# Altium PCB OkosEszkozBoard.PcbDoc
Units mm, origin at the board's own origin, x right, y up, seen from the top; angles counter-clockwise.
Board outline 50 x 85 mm, 2 copper layers (Top Layer, Bottom Layer); 26 components, 20 nets, 100 pads, 6 vias.
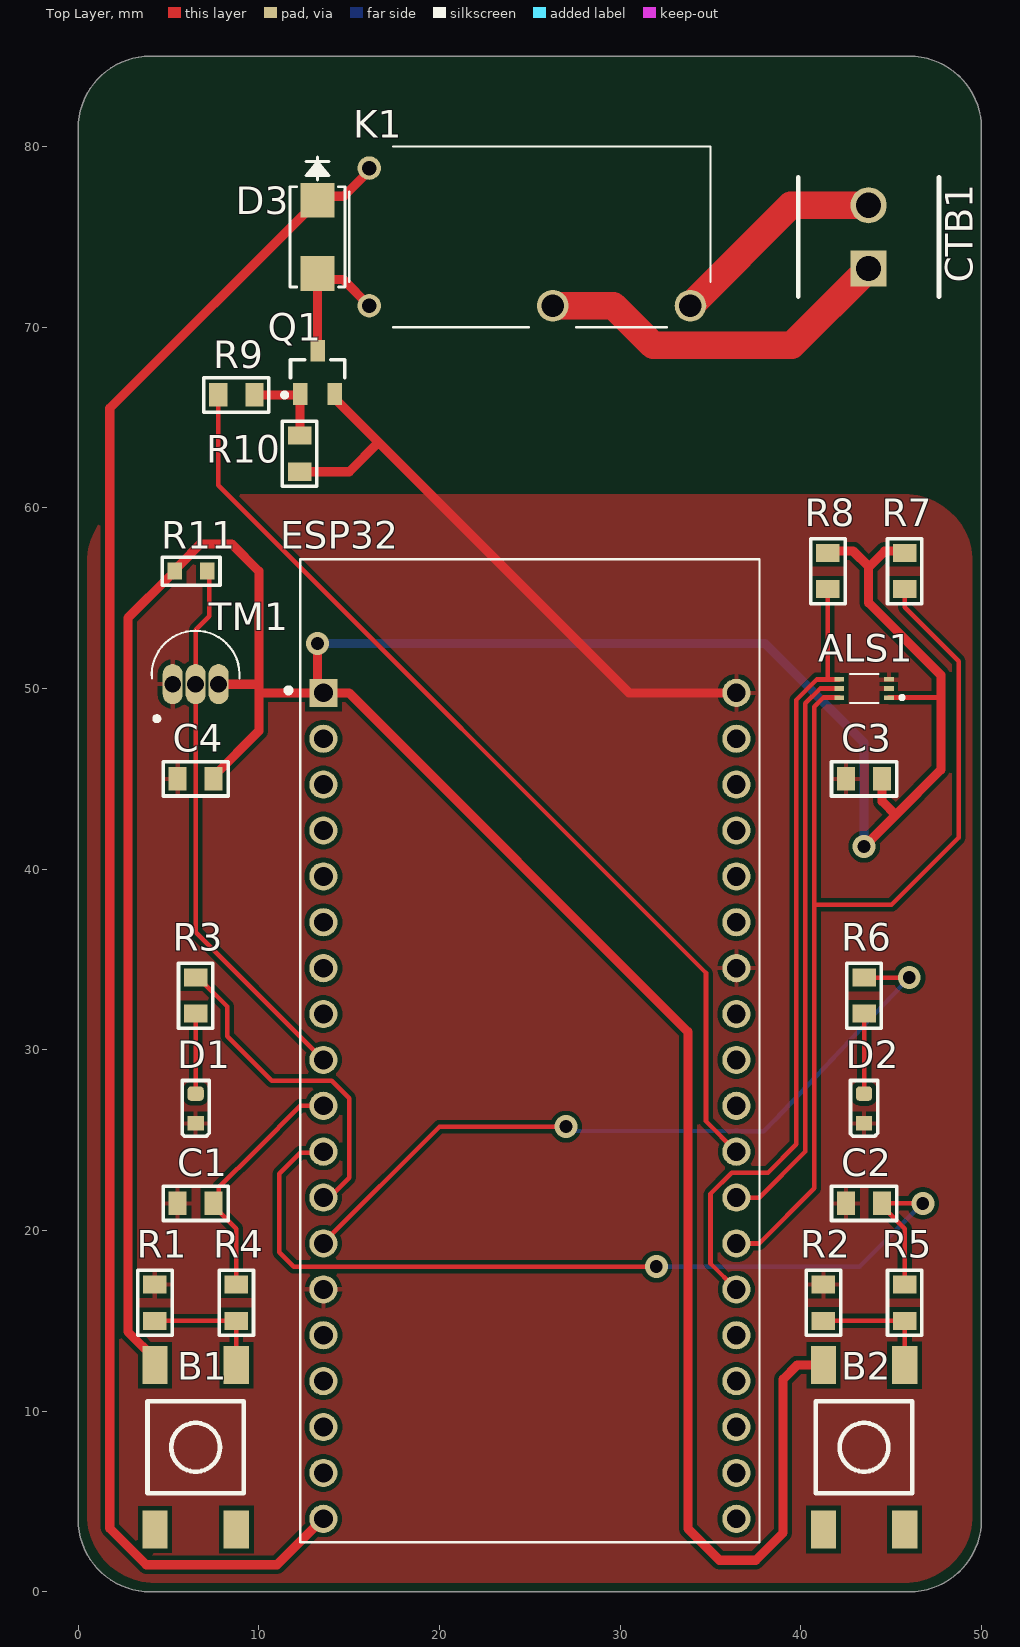
[diagram p0: Top Layer view]
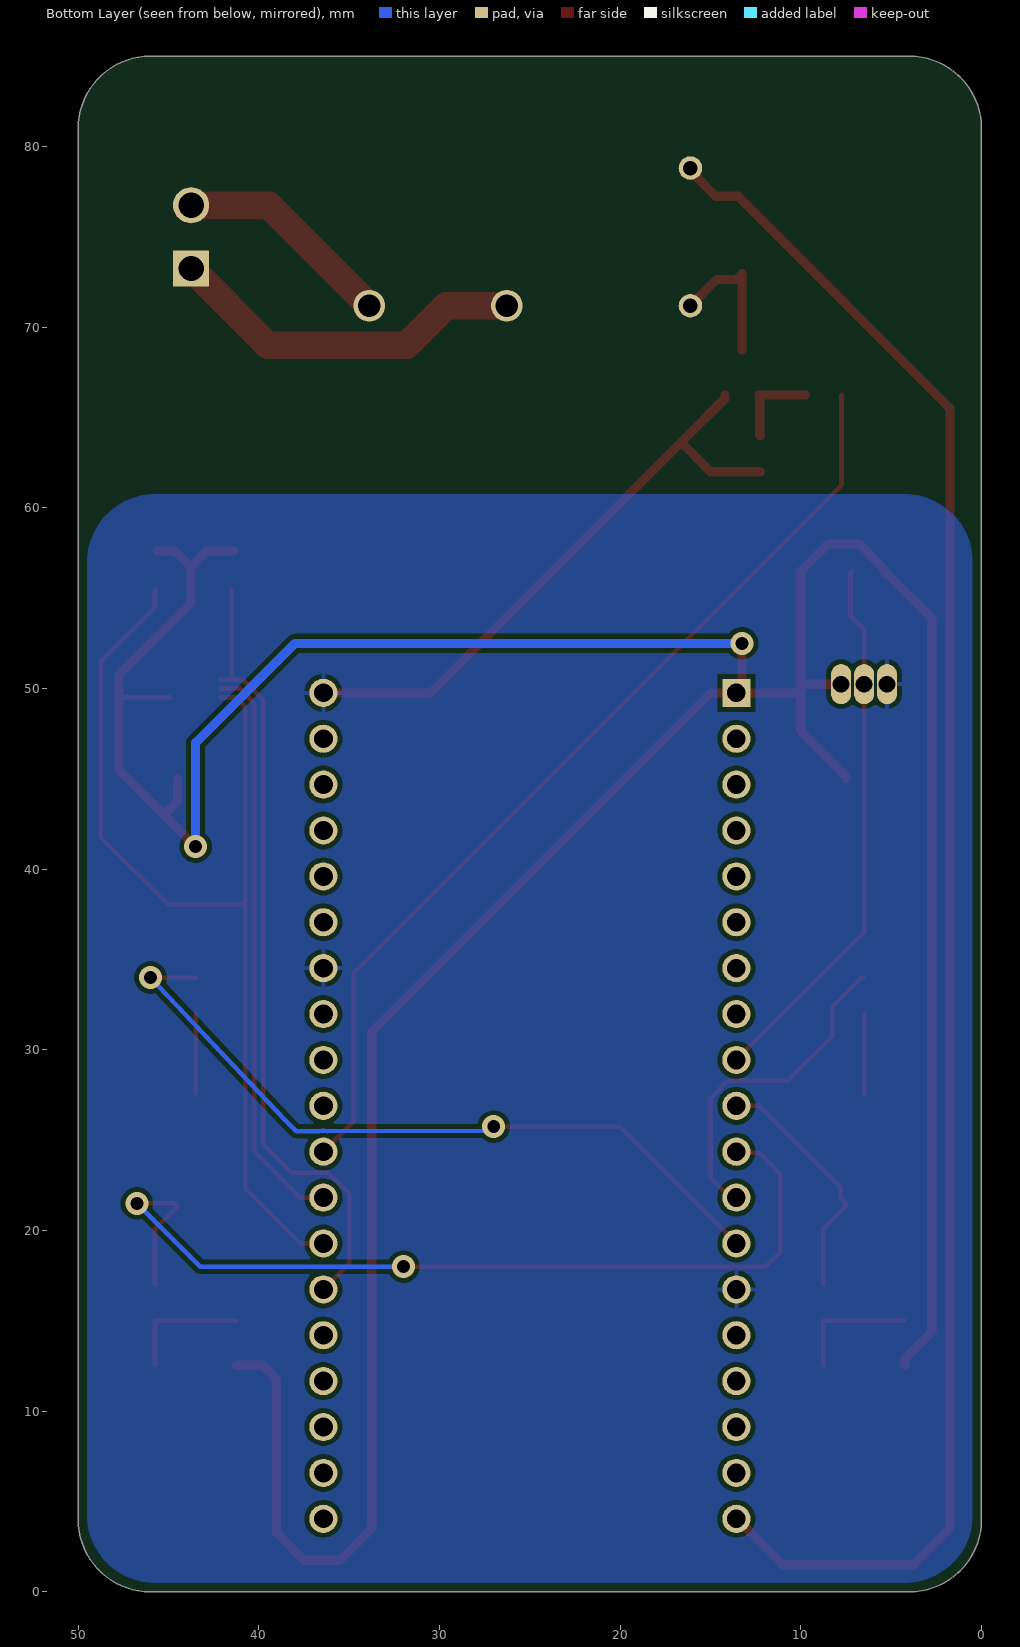
[diagram p1: Bottom Layer view, seen from below]
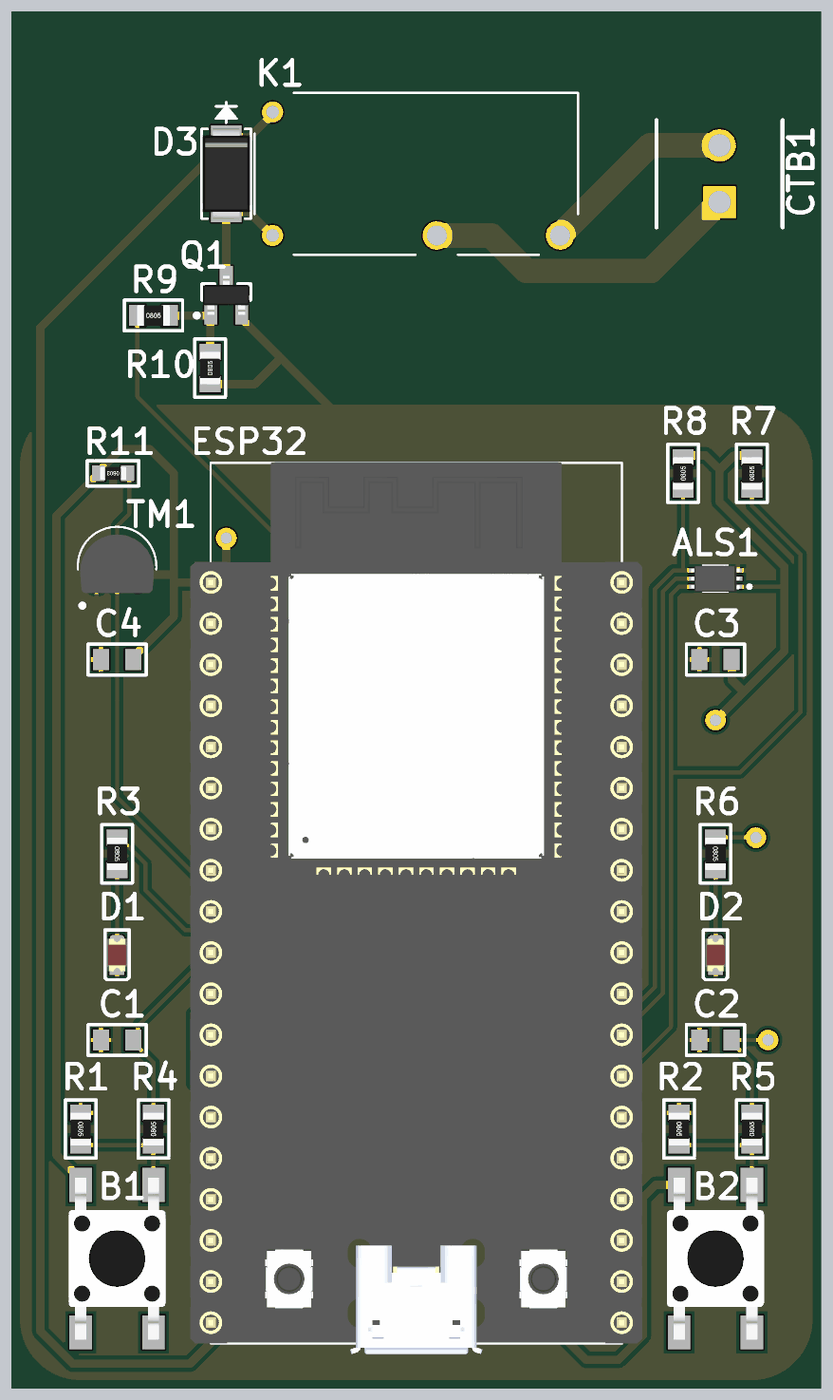
[diagram p2: 3D render of the assembled board from above, using the file's embedded part models]

## Layer stack, top to bottom
Top Solder: solder mask 0.0102, Solder Resist, Dk 3.5
Top Layer: signal copper 0.0406
Dielectric 1: dielectric 0.32, FR-4, Dk 4.8
Bottom Layer: signal copper 0.0406
Bottom Solder: solder mask 0.0102, Solder Resist, Dk 3.5

## Board outline
4,0 46,0 ccw(c46,4) 50,4 50,81 ccw(c46,81) 46,85 4,85 ccw(c4,81) 0,81 0,4 ccw(c4,4)

## Design rules (kind name [scope] priority, off if disabled: settings)
Clearance [All] p1: gap=0.254 ignorepadtopadclearanceinfootprint=TRUE except(0: Arc-Hole Track-Hole SMDPad-Hole THPad-Hole Via-Hole Fill-Hole Poly-Hole Region-Hole Text-Hole; 0.229: Arc-Arc Arc-Track Arc-SMDPad Track-Track Track-SMDPad)
PolygonConnect [All] p1: connectstyle=Relief reliefconductorwidth=0.254 reliefentries=4 polygonreliefangle="90 Angle" airgapwidth=0.254
RoutingVias [All] p1: holewidth=0.711 width=1.27 viastyle="Through Hole" minholewidth=0.711 minwidth=1.27 maxholewidth=0.711 maxwidth=1.27
SilkToSolderMaskClearance [All] p1: minsilkscreentomaskgap=0.254 clearancetoexposedcopper=TRUE
SolderMaskExpansion [All] p1: expansion=0.102 istentingtop=FALSE
Width [All] p1: maxlimit=2.032 minlimit=0.254 preferedwidth=0.254
29 further rules are at their usual default settings.

## Components (designator, comment, footprint, x,y, rotation, side; value= is the part's Value field where it differs from the comment)
ALS1 "BH1750FVI-TR" ONLAB_BH1750FVI-TR 43.5,50 r180 top
B1 "Button" FP_BTN_SMD 6.5,8 r0 top
B2 "Button" FP_BTN_SMD 43.5,8 r0 top
C1 "2.2uF" FP_0805_CAP_085 6.5,21.5 r0 top
C2 "2.2uF" FP_0805_CAP_085 43.5,21.5 r0 top
C3 "100nF" FP_0805_CAP_085 43.5,45 r0 top
C4 "100nF" FP_0805_CAP_085 6.5,45 r0 top
CTB1 "Contact Terminal Block" ONLAB_SORK_2_RN3.50 43.75,71.5 r90 top
D1 "RED LED" FP_0805_LED_RED 6.5,26.75 r270 top
D2 "RED LED" FP_0805_LED_RED 43.5,26.75 r270 top
D3 "Diode" ONLAB_SMA_DO-214AC 13.25,75 r270 top
ESP32 "NodeMCU ESP-32S" ONLAB_ESP32-DEVKITC-32D 25,30 r0 top locked (schematic designator ESP1)
K1 "Relay" ONLAB_RELAY_ALQ305 25,75 r0 top
Q1 "NMOS" ONLAB_2N7002_SOT23127P600-8N 13.25,67.5 r0 top
R1 "10K" FP_0805_RES 4.25,16 r270 top
R2 "10K" FP_0805_RES 41.25,16 r270 top
R3 "91R0" FP_0805_RES 6.5,33 r270 top
R4 "4K70" FP_0805_RES 8.75,16 r90 top
R5 "4K70" FP_0805_RES 45.75,16 r90 top
R6 "91R0" FP_0805_RES 43.5,33 r270 top
R7 "4K70" FP_0805_RES 45.75,56.5 r90 top
R8 "4K70" FP_0805_RES 41.5,56.5 r90 top
R9 "130R" FP_0805_RES 8.75,66.25 r0 top
R10 "10K" FP_0805_RES 12.25,63 r90 top
R11 "4K70" FP_0603_RES 6.25,56.5 r180 top
TM1 "DS18B20" ONLAB_DS18B20+ 6.5,51 r0 top

## Footprints (in the part's own frame and the unit in brackets; to place one, negate y for a bottom-side part, rotate by r counter-clockwise, add the part's x,y. Pads: shape width x height; smd on the part's side, far side on the other; paste and mask are expansions set on the pad)
FP_0603_RES [mm] "0603 ellenállás"
  rect 0.8x0.95 smd: 1(-0.9,0) 2(0.9,0)
  silkscreen extent -1.6,-0.77 1.6,0.77, body extent -0.8,-0.4 0.8,0.4, height 0.44
FP_0805_CAP_085 [mm] "0805 kapacitás YAGEO 0.85mm magas"
  rect 1x1.3 smd: 1(-1,0) 2(1,0)
  silkscreen extent -1.8,-0.95 1.8,0.95, body extent -1,-0.64 1.03,0.64, height 0.85
FP_0805_LED_RED [mm] "0805 méretű piros LED"
  rrect50% 0.8x0.9 smd: A(-0.825,0)
  rect 0.8x0.9 smd: K(0.825,0)
  silkscreen extent -1.55,-0.75 1.53,0.75, body extent -1.01,-0.62 1.01,0.62, height 1.1
FP_0805_RES [mm] "0805 ellenállás"
  rect 1x1.3 smd: 1(-1,0) 2(1,0)
  silkscreen extent -1.8,-0.95 1.8,0.95, body extent -1,-0.62 1,0.63, height 0.62
FP_BTN_SMD [mm] "SMD Push Button 6x6mm"
  rect 1.4x2.1 smd: 1(2.25,4.55) 2(2.25,-4.55) 3(-2.25,4.55) 4(-2.25,-4.55)
  silkscreen extent -2.67,-2.54 2.67,2.54, body extent -3,-5 3,5, height 5.1
ONLAB_2N7002_SOT23127P600-8N [mm]
  rect 0.8x1.2 smd: D(0,1.2) G(-0.95,-1.2) S(0.95,-1.2)
  silkscreen extent -1.95,-1.37 1.5,0.7, body extent -1.45,-1.2 1.45,1.2, height 0.96
ONLAB_BH1750FVI-TR [mm]
  rect 0.55x0.25 smd: 1(-1.375,0.5) 2(-1.375,0) 3(-1.375,-0.5) 4(1.375,-0.5) 5(1.375,0) 6(1.375,0.5)
  silkscreen extent -2.2,-0.8 0.78,0.8, body extent -1.5,-0.8 1.5,0.8, height 0.75
ONLAB_DS18B20+ [mm]
  oval 1.11x2.22 hole 0.93: 1(-1.27,-0.76) 2(0,-0.76) 3(1.27,-0.76)
  silkscreen extent -2.43,-2.79 2.43,2.2, body extent -2.28,-1.89 2.28,1.73, height 7.45
ONLAB_ESP32-DEVKITC-32D [mm]
  rect 1.56x1.56 hole 1.04: 1(-11.43,19.76)
  round 1.56 hole 1.04: 2(-11.43,17.22) 3(-11.43,14.68) 4(-11.43,12.14) 5(-11.43,9.6) 6(-11.43,7.06) 7(-11.43,4.52) 8(-11.43,1.98) 9(-11.43,-0.56) 10(-11.43,-3.1) 11(-11.43,-5.64) 12(-11.43,-8.18) 13(-11.43,-10.72) 14(-11.43,-13.26) 15(-11.43,-15.8) 16(-11.43,-18.34) 17(-11.43,-20.88) 18(-11.43,-23.42) 19(-11.43,-25.96) 20(11.43,19.76) 21(11.43,17.22) 22(11.43,14.68) 23(11.43,12.14) 24(11.43,9.6) 25(11.43,7.06) 26(11.43,4.52) 27(11.43,1.98) 28(11.43,-0.56) 29(11.43,-3.1) 30(11.43,-5.64) 31(11.43,-8.18) 32(11.43,-10.72) 33(11.43,-13.26) 34(11.43,-15.8) 35(11.43,-18.34) 36(11.43,-20.88) 37(11.43,-23.42) 38(11.43,-25.96)
  silkscreen extent -13.5,-27.25 12.71,27.15, body extent -13.97,-27.9 13.97,27.2, height 6.7
ONLAB_RELAY_ALQ305 [mm]
  round 1.3 hole 0.8: C1(-8.89,-3.81) C2(-8.89,3.81)
  round 1.75 hole 1.25: COM(1.27,-3.81) NO(8.89,-3.81)
  silkscreen extent -10,-5 10,5, body extent -10,-5 10,5, height 16
ONLAB_SMA_DO-214AC [mm] "Vishay Dióda"
  rect 1.92x1.88 smd: A(2.032,0) K(-2.032,0)
  silkscreen extent -4.42,-1.52 2.77,1.52, body extent -2.8,-1.47 2.8,1.48, height 2.7
ONLAB_SORK_2_RN3.50 [mm]
  rect 2x2 hole 1.4: 1(1.75,0)
  round 2 hole 1.4: 2(5.25,0)
  silkscreen extent 0.2,-3.9 6.8,3.9, body extent 0.05,-3.6 6.95,3.6, height 9.1

## Part data
ALS1: "Digital 16bit Serial Output Type Ambient Light Sensor IC"
B1 B2: library part "Button 4P", "Push button"
C1 C2 C3 C4: library part CAP, "Capacitor"
CTB1: library part CTB, "SORKAPOCS 2 P RM3.50 CPP3.5/2 (STE) LIFTES 1mmř 10A"
D1 D2: library part LED, "Typical RED GaAs LED"
D3: "Default Diode", Code_JEDEC=DO-214-AB, LatestRevisionDate=17-Jul-2002, LatestRevisionNote="Re-released for DXP Platform.", PackageDescription="DO-214-AB/SMC; 2 C-Bend Leads; Body 7.9 x 5.9 mm, inc. leads (LxW)", PackageReference=SMC, PackageVersion=Sep-1996, Published=8-Jun-2000, Publisher="Altium Limited"
ESP32: "NodeMCU ESP32 Wireless & / Bluetooth Development Board"
K1: library part Relay-SPST, "Single-Pole Single-Throw Relay", LatestRevisionDate=17-Jul-2002, LatestRevisionNote="Re-released for DXP Platform.", PackageReference=MODULE4, Published=24-Mar-1999, Publisher="Altium Limited"
Q1: "NXP - BSP030,115 - MOSFET, N CH, 30V, 10A, SOT223"
R1 R2 R3 R4 R5 R6 R7 R8 R9 R10 R11: library part RES, "Resistor"
TM1: "Programmable Resolution 1-Wire Digital Thermometer"

## Via types
v1: diameter 1.27, hole 0.711, Top Layer to Bottom Layer, 6 vias

## Nets (pads, with @x,y where several pads share a name; then routed paths per layer and width w, separated by ;. In a path a pad name is that pad's centre, name@x,y a point inside that pad or via, vN(x,y) a via of type N, cw(c..) or ccw(c..) an arc to the next point about the centre after c; other vN are vias at no path point)
3.3V: ALS1.1 B1.3 B2.3 C3.2 C4.2 ESP32.1 R7.2 R8.2 R11.2 TM1.3 | length 213.3
  Top Layer w0.254: ALS1.1 47.75,49.5
  Top Layer w0.508: B1.3 4.25,12.9 2.75,14.4 2.75,53.9 5.129,56.279 5.204,56.279 5.35,56.425 R11.2 5.496,56.646 5.496,56.721 6.25,57.475 6.25,57.5 6.75,58 8.5,58 10,56.5 10,50.25 ; C4.2 7.5,45.15 10,47.65 10,49.75 ; TM1.3 9.99,50.24 10,50.25 ; v1(13.25,52.5) 13.25,50.08 ESP32.1 ; B2.3 39.8,12.55 39.017,11.767 39.017,3.267 37.5,1.75 35.5,1.75 33.75,3.5 33.75,31 14.99,49.76 ESP32.1 ; R8.2@41.391,57.609 42.891,57.609 43.75,56.75 43.75,56.718 ; v1(43.5,41.25) 45.25,43 ; C3.2 44.5,43.75 45.25,43 ; R7.2@45.636,57.603 44.636,57.603 43.75,56.718 ; 10,49.75 10,50.25 ; 10,49.75 13.56,49.75 ESP32.1 ; 43.75,56.718 43.75,54.75 47.75,50.75 47.75,49.5 47.75,45.5 45.25,43
  Bottom Layer w0.508: v1(13.25,52.5) 38,52.5 43.5,47 v1(43.5,41.25)
5V: D3.K ESP32.19 K1.C2 | length 95.6
  Top Layer w0.508: ESP32.19@13.493,3.993 11,1.5 3.768,1.5 1.75,3.518 1.75,65.512 13.25,77.012 D3.K 13.468,77.25 14.702,77.25 16.11,78.658 K1.C2
ALS_DVI: ALS1.5 ESP32.31 | length 31.9
  Top Layer w0.254: ESP32.31 37.7,21.82 40.25,24.37 40.25,49.183 41.067,50 ALS1.5
ALS_I2C_SCL: ALS1.6 ESP32.32 R7.1 | length 58.4
  Top Layer w0.254: ESP32.32 37.7,19.28 40.75,22.33 40.75,38.021 ; ALS1.6 41.25,49.5 40.75,49 40.75,38.021 ; R7.1 45.75,54.5 48.75,51.5 48.75,41.75 45.021,38.021 40.75,38.021
ALS_I2C_SDA: ALS1.4 ESP32.33 R8.1 | length 44.2
  Top Layer w0.254: ESP32.33 35,18.17 35,22.032 36.167,23.199 38.181,23.199 39.75,24.768 39.75,49.365 40.885,50.5 41.505,50.5 ; R8.1 41.5,50.505 41.505,50.5 ; ALS1.4 41.505,50.5
BTN0: C1.2 ESP32.10 R4.2 | length 13.7
  Top Layer w0.254: R4.2 8.75,20.1 7.5,21.35 C1.2 7.782,21.782 7.782,22.382 9.873,24.473 12.3,26.9 ESP32.10
BTN1: C2.2 ESP32.11 R5.2 | length 51.8
  Top Layer w0.254: ESP32.11 13.51,24.3 12.3,24.3 11.139,23.139 11.139,18.799 11.938,18 v1(32,18) ; R5.2 45.75,20.1 44.5,21.35 44.65,21.5 v1(46.75,21.5)
  Bottom Layer w0.254: v1(32,18) 43.25,18 v1(46.75,21.5)
GND: ALS1.2 ALS1.3 C1.1 C2.1 C3.1 C4.1 D1.K D2.K ESP32.14 ESP32.20 ESP32.26 Q1.S R1.1 R2.1 R10.1 TM1.1 | length 34.2
  Top Layer w0.508: R10.1 15,62 16.625,63.625 ; Q1.S@14.2,66.25 14.2,66.05 16.625,63.625 ; ESP32.20 30.49,49.76 16.625,63.625
LED0: ESP32.13 R6.1 | length 41.4
  Top Layer w0.254: ESP32.13@13.512,19.262 20,25.75 v1(27,25.75) ; R6.1 v1(46,34)
  Bottom Layer w0.254: v1(27,25.75) 27.165,25.585 27.24,25.51 36.193,25.501 36.214,25.501 cw(c36.43,24.36) 36.648,25.5 37.144,25.5 37.941,25.5 38.544,26.103 v1(46,34)
LED1: ESP32.12 R3.1 | length 18.3
  Top Layer w0.254: R3.1 6.65,34 8.25,32.4 8.25,30.75 10.721,28.279 14.041,28.279 15,27.32 15,22.92 ESP32.12@13.839,21.759
NetB1_1: B1.1 R1.2 R4.1 | length 7
  Top Layer w0.254: R1.2 R4.1 B1.1
NetB2_1: B2.1 R2.2 R5.1 | length 6.9
  Top Layer w0.254: R2.2 R5.1 B2.1
NetCTB1_1: CTB1.1 K1.COM | length 20.1
  Top Layer w1.524: K1.COM 29.628,71.19 31.818,69 39.5,69 CTB1.1
NetCTB1_2: CTB1.2 K1.NO | length 12.2
  Top Layer w1.524: K1.NO 39.45,76.75 CTB1.2
NetD1_A: D1.A R3.2 | length 4.4
  Top Layer w0.254: D1.A R3.2
NetD2_A: D2.A R6.2 | length 4.4
  Top Layer w0.254: D2.A R6.2
NetD3_1: D3.A K1.C1 Q1.D | length 7.8
  Top Layer w0.508: Q1.D@13.25,68.75 D3.A 13.572,72.646 14.654,72.646 K1.C1
NetESP1_9: ESP32.9 R11.1 TM1.2 | length 30.3
  Top Layer w0.254: R11.1 7.25,56.4 7.25,54 6.5,53.25 TM1.2 6.5,36.51 ESP32.9
NetESP1_30: ESP32.30 R9.1 | length 53.8
  Top Layer w0.254: R9.1 7.75,61.25 34.75,34.25 34.75,26.04 ESP32.30
NetQ1_1: Q1.G R9.2 R10.2 | length 4.8
  Top Layer w0.508: R9.2 12.3,66.25 12.275,66.225 12.275,64.025 R10.2
pads on no net: B1.2 B1.4 B2.2 B2.4 ESP32.2 ESP32.3 ESP32.4 ESP32.5 ESP32.6 ESP32.7 ESP32.8 ESP32.15 ESP32.16 ESP32.17 ESP32.18 ESP32.21 ESP32.22 ESP32.23 ESP32.24 ESP32.25 ESP32.27 ESP32.28 ESP32.29 ESP32.34 ESP32.35 ESP32.36 ESP32.37 ESP32.38

## Polygon pours and split planes (outlines as drawn)
GND on Bottom Layer "GND_L02_P004" (solid, remove dead copper, pour order 4): 4.25,60.75 45.75,60.75 cw(c45.75,57) 49.5,57 49.5,4.25 cw(c45.75,4.25) 45.75,0.5 4.25,0.5 cw(c4.25,4.25) 0.5,4.25 0.5,57 cw(c4.25,57)
GND on Top Layer "GND_L01_P002" (solid, remove dead copper, pour order 2): 4.25,60.75 45.75,60.75 cw(c45.75,57) 49.5,57 49.5,4.25 cw(c45.75,4.25) 45.75,0.5 4.25,0.5 cw(c4.25,4.25) 0.5,4.25 0.5,57 cw(c4.25,57)

## Silkscreen, mask and mechanical layers (free items; w line width, h text height)
Mechanical 1:
  the board outline again, w0.254